# EAGLE board Potencia (EAGLE 9.6.2)
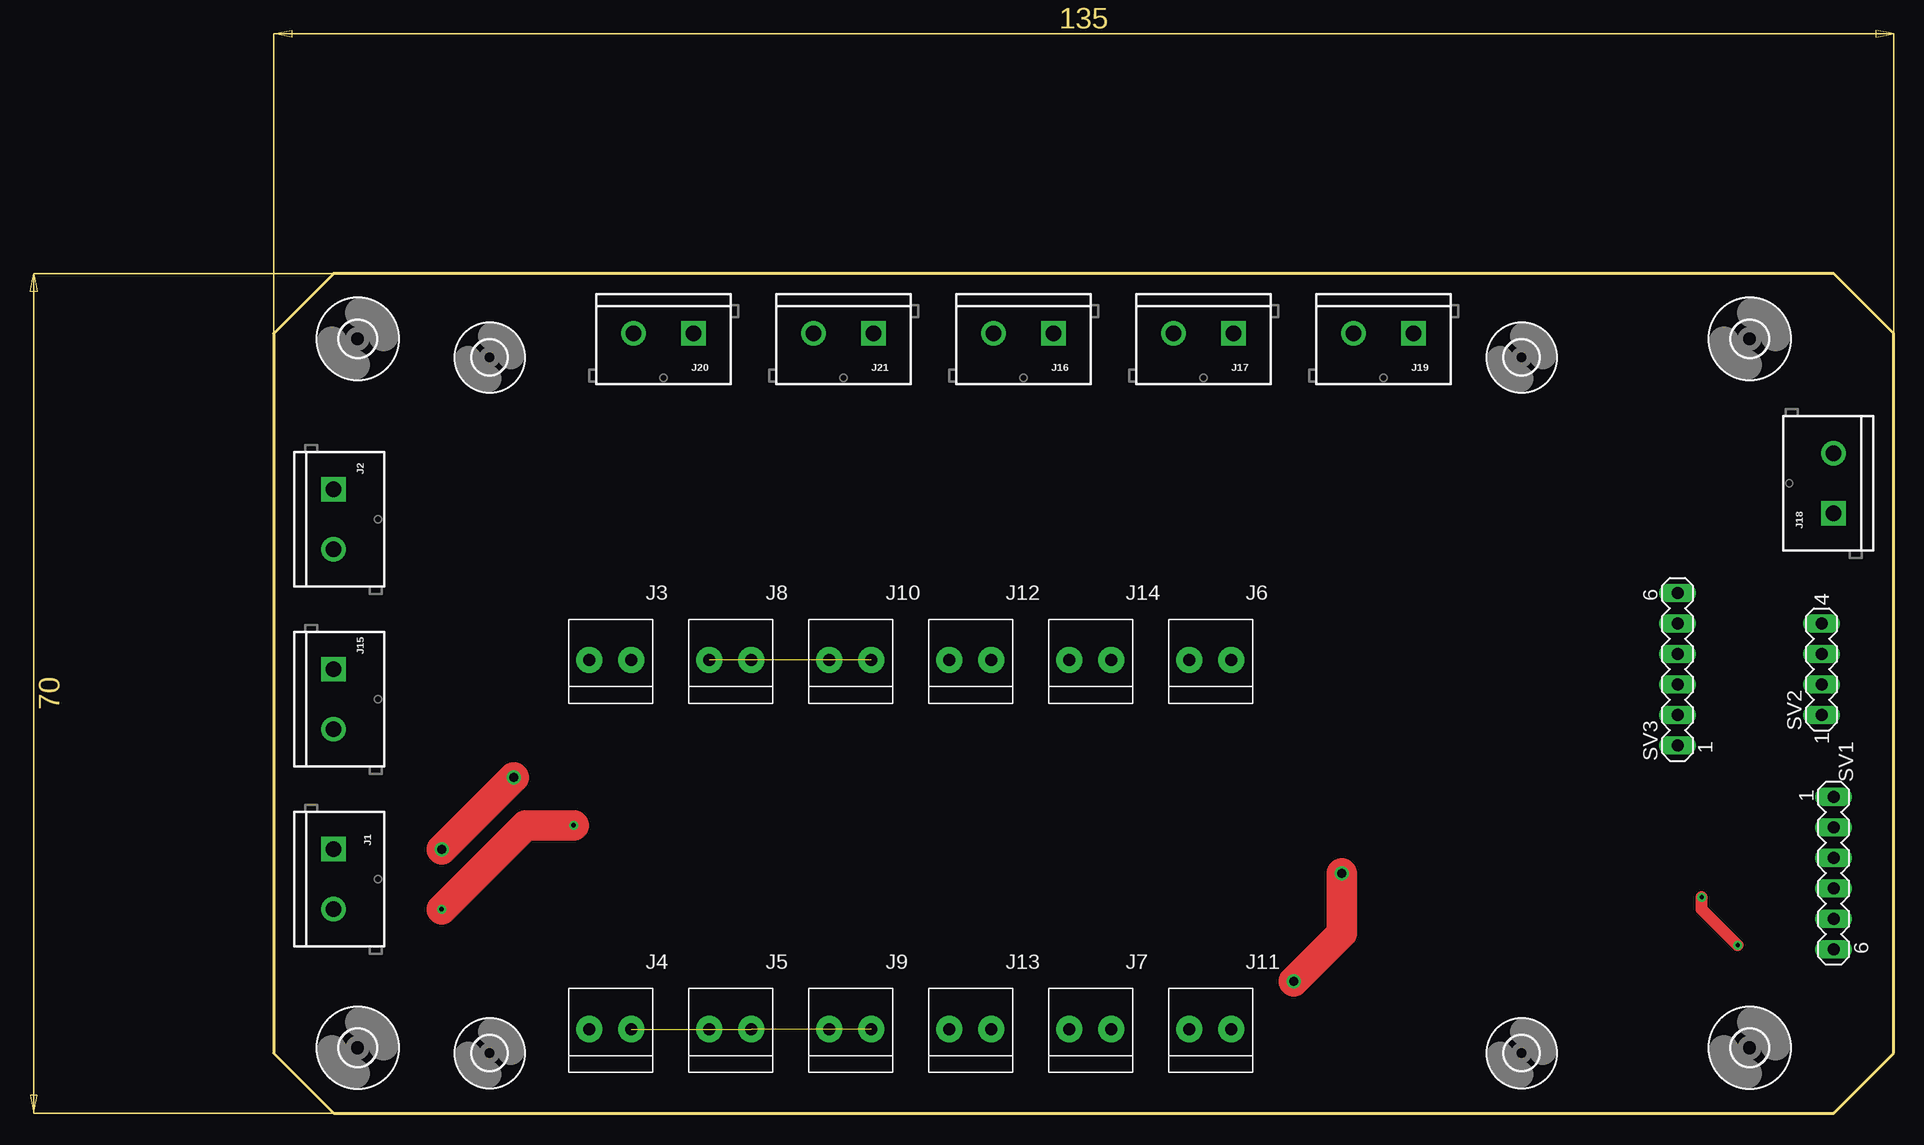
[diagram p0: board, top side]
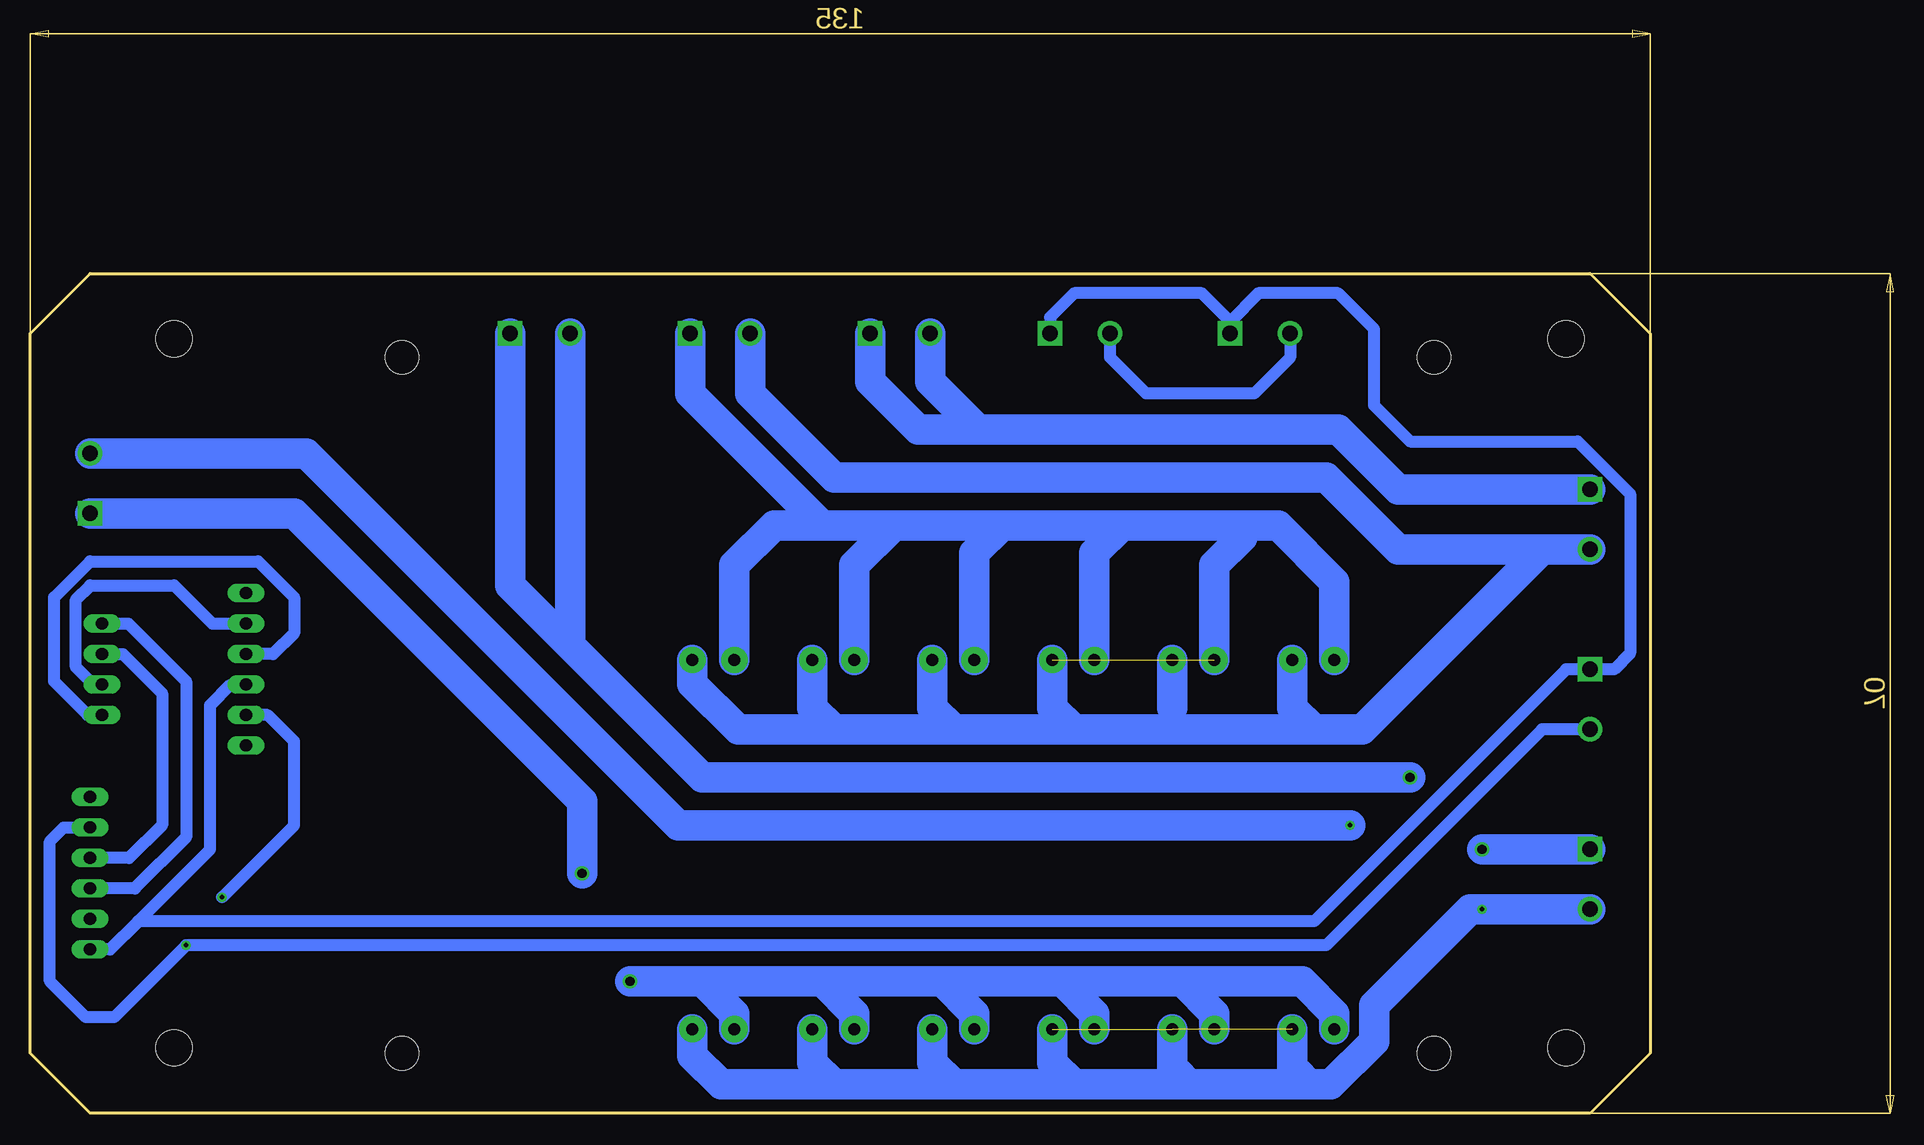
[diagram p1: board, bottom side, seen from below]

Size 135 x 70 mm. Coordinates in mm from the lower left corner, seen from the top.
Outline: 130,70 5,70 0,65 0,5 5,0 130,0 135,5 135,65 130,70
Copper layers (1*16): Top 0.035mm / dielectric 1.5mm / Bottom 0.035mm
Design rules "default": minimum track width 6mil, minimum drill 0.35mm, track to track 6mil, track to pad 6mil, pad to pad 6mil, via to via 6mil, smd to smd 6mil, copper to edge 40mil, drill to drill 6mil, minimum pad ring 10mil, minimum via ring 8mil, stop-mask expansion 4mil, vias tented up to drill 0mil, thermal gap 10mil
Net classes: 1 Power: width 2.54 mm, drill 0.762 mm, clearance 0.61 mm

## Footprints (pad centres in the part's own frame; a part is rotated, then mirrored left to right if it is on the bottom)
SCREWTERMINAL-5MM-2 = drill 1.3 pad 2.032 square: 1 0,0 | drill 1.3 pad 2.032: 2 5,0
1X2-3.5MM = drill 1 pad 2.184: 1 1.8,0; 2 -1.7,0
MA06-1 = drill 1.016 long: 1 -6.35,0; 2 -3.81,0; 3 -1.27,0; 4 1.27,0; 5 3.81,0; 6 6.35,0
MA04-1 = drill 1.016 long: 1 -3.81,0; 2 -1.27,0; 3 1.27,0; 4 3.81,0
3,0 = hole 3: 0,0
2,8 = hole 2.8: 0,0

## Placement (x,y rotation side)
J1  [SCREWTERMINAL-5MM-2]  5,22 270 top
J2  [SCREWTERMINAL-5MM-2]  5,52 270 top
J3  1X2-3.5MM  [1X2-3.5MM]  28,37.77 0 top
J4  1X2-3.5MM  [1X2-3.5MM]  28,7 0 top
J5  1X2-3.5MM  [1X2-3.5MM]  38,7 0 top
J6  1X2-3.5MM  [1X2-3.5MM]  78,37.77 0 top
J7  1X2-3.5MM  [1X2-3.5MM]  68,7 0 top
J8  1X2-3.5MM  [1X2-3.5MM]  38,37.77 0 top
J9  1X2-3.5MM  [1X2-3.5MM]  48,7 0 top
J10  1X2-3.5MM  [1X2-3.5MM]  48,37.77 0 top
J11  1X2-3.5MM  [1X2-3.5MM]  78,7 0 top
J12  1X2-3.5MM  [1X2-3.5MM]  58,37.77 0 top
J13  1X2-3.5MM  [1X2-3.5MM]  58,7 0 top
J14  1X2-3.5MM  [1X2-3.5MM]  68,37.77 0 top
J15  [SCREWTERMINAL-5MM-2]  5,37 270 top
J16  [SCREWTERMINAL-5MM-2]  65,65 180 top
J17  [SCREWTERMINAL-5MM-2]  80,65 180 top
J18  [SCREWTERMINAL-5MM-2]  130,50 90 top
J19  [SCREWTERMINAL-5MM-2]  95,65 180 top
J20  [SCREWTERMINAL-5MM-2]  35,65 180 top
J21  [SCREWTERMINAL-5MM-2]  50,65 180 top
SV1  [MA06-1]  130,20 270 top
SV2  [MA04-1]  129,37 90 top
SV3  [MA06-1]  117,37 90 top
U$1  [3,0]  7,5.45 0 top
U$2  [3,0]  123,5.45 0 top
U$3  [3,0]  123,64.55 0 top
U$4  [3,0]  7,64.55 0 top
U$9  [2,8]  18,63 0 top
U$10  [2,8]  104,63 0 top
U$11  [2,8]  104,5 0 top
U$12  [2,8]  18,5 0 top

## Library data of the parts
J1 J2 J15-J21 = SparkFun-Connectors; SF_SKU: PRT-08432
J3-J14 = adafruit
SV1-SV3 = con-lstb; OC_FARNELL: unknown; OC_NEWARK: unknown
U$1-U$4 U$9-U$12 = holes

## Nets
5V_C: J15.2 SV1.2 SV3.2
5V_MICRO: J20.2 J21.2
GND: J15.1 J20.1 J21.1 SV1.6 SV3.3
MDER+_B: J4.2 J5.2 J7.2 J9.2 J11.2 J13.2 J18.1
MDER+_REL: J1.1 J19.1 J19.2
MDER-: J1.2 J4.1 J5.1 J7.1 J9.1 J11.1 J13.1 J18.2
MIZQ+_B: J3.2 J6.2 J8.2 J10.2 J12.2 J14.2 J17.1
MIZQ+_REL: J2.1 J16.1 J16.2
MIZQ-: J2.2 J3.1 J6.1 J8.1 J10.1 J12.1 J14.1 J17.2
N$1: SV1.5
N$2: SV3.1
N$3: SV3.6
N$6: SV1.1
RX: SV2.2 SV3.5
SCL: SV1.4 SV2.4
SDA: SV1.3 SV2.3
TX: SV2.1 SV3.4

## Tracks (layer width: path | path; a pad name or v marks a point on that pad's centre or on a via)
5V_C  (via drill 0.35)
  Top 1.016: v122,14 119,17 v119,18
  Bottom 1.016: J15.2 9,32 27,14 v122,14 128,8 130.35,8 133.35,11 133.35,22.65 132.19,23.81 SV1.2 | v119,18 113,24 113,31 115.19,33.19 SV3.2
5V_MICRO
  Bottom 1.016: J20.2 30,63 33,60 42,60 45,63 J21.2
GND
  Bottom 1.016: SV1.6 128.35,13.65 126,16 | 126,16 28,16 7,37 J15.1 3,37 1.65,38.35 1.65,51.62 6.03,56 20,56 23,59 23,65.35 26,68.35 32.65,68.35 35,66 | 35,66 37.35,68.35 48,68.35 50,66.35 J21.1 | J20.1 35,66 | 126,16 120,22 120,34 118.27,35.73 SV3.3
MDER+_B  (via drill 0.76)
  Top 2.54: v89,20 89,15 v85,11
  Bottom 2.54: v85,11 79,11 | 79,11 69,11 | 69,11 59,11 | 59,11 49,11 | 49,11 39,11 | 39,11 29,11 26.3,8.3 J4.2 | J5.2 36.3,8.3 39,11 | J9.2 46.3,8.3 49,11 | J13.2 56.3,8.3 59,11 | J7.2 66.3,8.3 69,11 | J11.2 76.3,8.3 79,11 | v89,20 89,26 113,50 J18.1
MDER+_REL  (via drill 0.76)
  Top 2.54: v14,22 v20,28
  Bottom 2.54: J1.1 v14,22 | v20,28 79,28 90,39 | 90,39 J19.2 | 90,39 95,44 J19.1
MDER-  (via drill 0.35)  (2 unrouted)
  Top 2.54: v14,17 21,24 v25,24
  Bottom 2.54: J11.1 79.8,4.8 77.41,2.41 68,2.41 | 48,2.41 26.59,2.41 23,6 23,9 15,17 v14,17 J1.2 | 48,2.41 58,2.41 | 58,2.41 68,2.41 | J4.1 29.8,3.8 29,3 | J5.1 39.8,3.8 39,3 | J13.1 59.8,4.21 58,2.41 | J7.1 69.8,4.21 68,2.41 | J9.1 49.8,4.21 48,2.41 | v25,24 81,24 112,55 J18.2
MIZQ+_B  (1 unrouted)
  Bottom 2.54: 69,49 63,49 | 63,49 54,49 | 54,49 44,49 | 44,49 31,49 26.3,44.3 J3.2 | J17.1 80,60 69,49 | J6.2 76.3,45.7 73,49 69,49 | J14.2 66.3,45.7 63,49 | J12.2 56.3,46.7 54,49 | J10.2 46.3,46.7 44,49 | J8.2 36.3,45.7 34,48
MIZQ+_REL
  Bottom 2.54: J2.1 21,52 26,57 56,57 | J16.2 60,61 56,57 | 56,57 61,57 65,61 J16.1
MIZQ-  (1 unrouted)
  Bottom 2.54: J6.1 79.8,35.8 76,32 68,32 | 28,32 48,32 | 48,32 58,32 | 58,32 68,32 | J3.1 29.8,33.8 28,32 | J8.1 39.8,33.8 | J10.1 49.8,33.8 48,32 | J12.1 59.8,33.8 58,32 | J14.1 69.8,33.8 68,32 | J2.2 9,47 | 28,32 24,32 9,47 | 9,47 21,47 27,53 68,53 75,60 J17.2
RX
  Bottom 1.016: SV2.2 129.73,35.73 131.18,37.18 131.18,42.82 130,44 123,44 119.81,40.81 SV3.5
SCL
  Bottom 1.016: SV2.4 126.81,40.81 122,36 122,23 126.27,18.73 SV1.4
SDA
  Bottom 1.016: SV2.3 127.27,38.27 124,35 124,24 126.73,21.27 SV1.3
TX
  Bottom 1.016: SV2.1 130.19,33.19 133,36 133,43 130,46 116,46 113,43 113,40 114.73,38.27 SV3.4